# Altium PCB Texas Instruments Test Project.PcbDoc
Units mm, origin at the board's own origin, x right, y up, seen from the top; angles counter-clockwise.
Board outline 152.4 x 101.6 mm, 2 copper layers (Top Layer, Bottom Layer); 5 components, 0 nets, 70 pads, 0 vias.
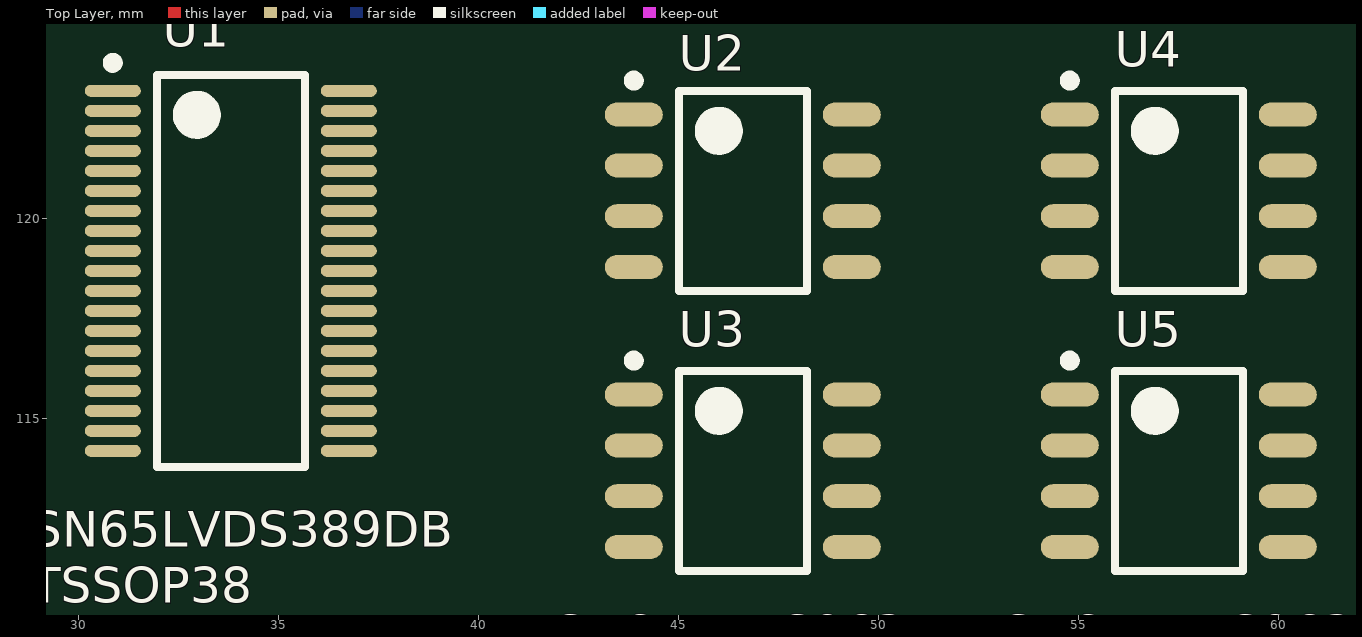
[diagram p0: Top Layer view]
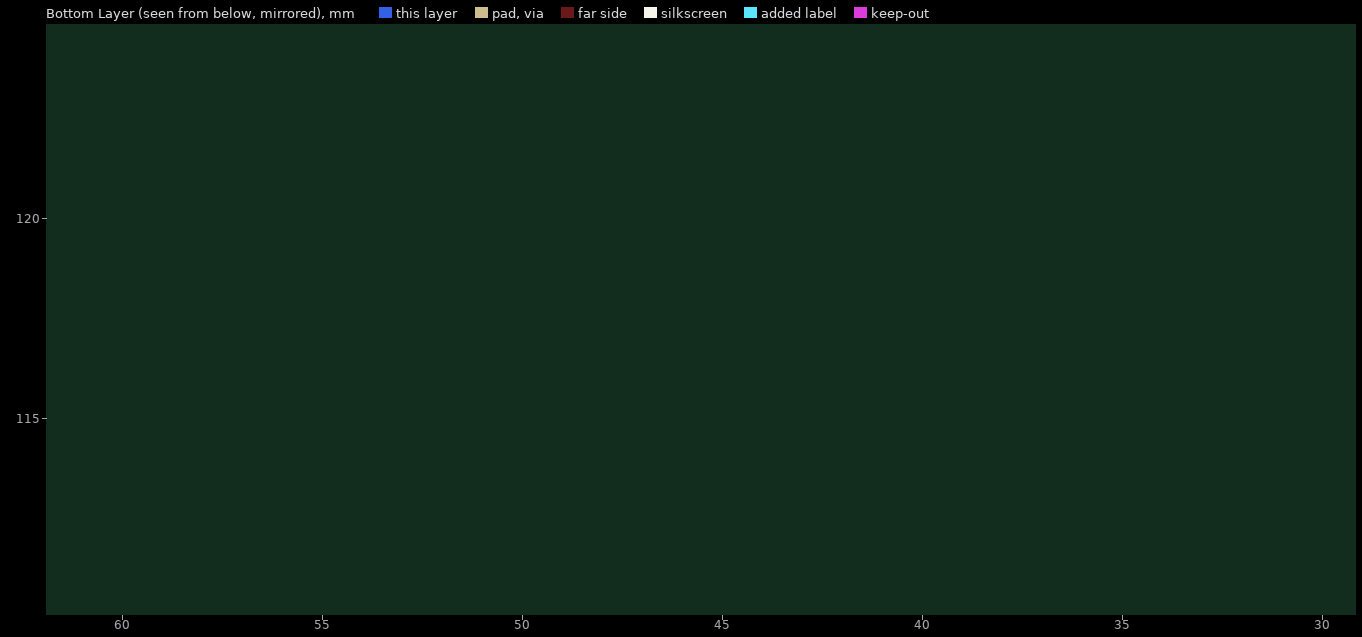
[diagram p1: Bottom Layer view, seen from below]

## Layer stack, top to bottom
Top Solder: solder mask 0.0102, Solder Resist, Dk 3.5
Top Layer: signal copper 0.0356
Dielectric 1: dielectric 0.32, FR-4, Dk 4.8
Bottom Layer: signal copper 0.0356
Bottom Solder: solder mask 0.0102, Solder Resist, Dk 3.5

## Board outline
25.4,25.4 177.8,25.4 177.8,127 25.4,127

## Design rules (kind name [scope] priority, off if disabled: settings)
Clearance [All] p1: gap=0.254
PolygonConnect [All] p1: connectstyle=Relief reliefconductorwidth=0.254 reliefentries=4 polygonreliefangle="90 Angle" airgapwidth=0.254
RoutingVias [All] p1: holewidth=0.711 width=1.27 viastyle="Through Hole" minholewidth=0.711 minwidth=1.27 maxholewidth=0.711 maxwidth=1.27
SolderMaskExpansion [All] p1: expansion=0.102
Width [All] p1: maxlimit=0.254 minlimit=0.254 preferedwidth=0.254
30 further rules are at their usual default settings.

## Components (designator, comment, footprint, x,y, rotation, side; value= is the part's Value field where it differs from the comment)
U1 "SN65LVDS389DB" "TSSOP38 - SN65LVDS389DB" 33.8,118.7 r0 top
U2 "SN65LVDS9637DR" "SOIC8 - SN65LVDS9637" 46.6,120.7 r0 top
U3 "SN65LVDS9637DR" "SOIC8 - SN65LVDS9637" 46.6,113.7 r0 top
U4 "SN65LVDS9638DR" "SOIC8 - SN65LVDS9638" 57.5,120.7 r0 top
U5 "SN65LVDS9638DR" "SOIC8 - SN65LVDS9638" 57.5,113.7 r0 top

## Footprints (in the part's own frame and the unit in brackets; to place one, negate y for a bottom-side part, rotate by r counter-clockwise, add the part's x,y. Pads: shape width x height; smd on the part's side, far side on the other; paste and mask are expansions set on the pad)
"SOIC8 - SN65LVDS9637" [mm] "SN65LVDS9637"
  oval 1.45x0.6 smd: 1(-2.725,1.905) 2(-2.725,0.635) 3(-2.725,-0.635) 4(-2.725,-1.905) 5(2.725,-1.905) 6(2.725,-0.635) 7(2.725,0.635) 8(2.725,1.905)
  silkscreen extent -2.85,-2.5 1.6,2.88, body extent -3.08,-2.5 3.08,2.5, height 1.75
"SOIC8 - SN65LVDS9638" [mm] "SN65LVDS9638"
  oval 1.45x0.6 smd: 1(-2.725,1.905) 2(-2.725,0.635) 3(-2.725,-0.635) 4(-2.725,-1.905) 5(2.725,-1.905) 6(2.725,-0.635) 7(2.725,0.635) 8(2.725,1.905)
  silkscreen extent -2.85,-2.5 1.6,2.88, body extent -3.08,-2.5 3.08,2.5, height 1.75
"TSSOP38 - SN65LVDS389DB" [mm] "SN65LVDS389DB"
  oval 1.4x0.3 smd: 1(-2.95,4.5) 2(-2.95,4) 3(-2.95,3.5) 4(-2.95,3) 5(-2.95,2.5) 6(-2.95,2) 7(-2.95,1.5) 8(-2.95,1) 9(-2.95,0.5) 10(-2.95,0) 11(-2.95,-0.5) 12(-2.95,-1) 13(-2.95,-1.5) 14(-2.95,-2) 15(-2.95,-2.5) 16(-2.95,-3) 17(-2.95,-3.5) 18(-2.95,-4) 19(-2.95,-4.5) 20(2.95,-4.5) 21(2.95,-4) 22(2.95,-3.5) 23(2.95,-3) 24(2.95,-2.5) 25(2.95,-2) 26(2.95,-1.5) 27(2.95,-1) 28(2.95,-0.5) 29(2.95,0) 30(2.95,0.5) 31(2.95,1) 32(2.95,1.5) 33(2.95,2) 34(2.95,2.5) 35(2.95,3) 36(2.95,3.5) 37(2.95,4) 38(2.95,4.5)
  silkscreen extent -3.07,-4.9 1.85,5.32, body extent -3.3,-4.9 3.3,4.9, height 1.2

## Part data
U1: "SN65LVDS - Differential Drivers and Receivers"
U2: library part "SN65LVDS9637DR Type-1", "SN65LVDS - Differential Drivers and Receivers"
U3: library part "SN65LVDS9637DR Type-2", "SN65LVDS - Differential Drivers and Receivers"
U4: library part "SN65LVDS9638DR Type-1", "SN65LVDS - Differential Drivers and Receivers"
U5: library part "SN65LVDS9638DR Type-2", "SN65LVDS - Differential Drivers and Receivers"

## Nets (pads, with @x,y where several pads share a name; then routed paths per layer and width w, separated by ;. In a path a pad name is that pad's centre, name@x,y a point inside that pad or via, vN(x,y) a via of type N, cw(c..) or ccw(c..) an arc to the next point about the centre after c; other vN are vias at no path point)
pads on no net: U1.1 U1.2 U1.3 U1.4 U1.5 U1.6 U1.7 U1.8 U1.9 U1.10 U1.11 U1.12 U1.13 U1.14 U1.15 U1.16 U1.17 U1.18 U1.19 U1.20 U1.21 U1.22 U1.23 U1.24 U1.25 U1.26 U1.27 U1.28 U1.29 U1.30 U1.31 U1.32 U1.33 U1.34 U1.35 U1.36 U1.37 U1.38 U2.1 U2.2 U2.3 U2.4 U2.5 U2.6 U2.7 U2.8 U3.1 U3.2 U3.3 U3.4 U3.5 U3.6 U3.7 U3.8 U4.1 U4.2 U4.3 U4.4 U4.5 U4.6 U4.7 U4.8 U5.1 U5.2 U5.3 U5.4 U5.5 U5.6 U5.7 U5.8

## Silkscreen, mask and mechanical layers (free items; w line width, h text height)
Top Overlay:
  text "SN65LVDS389DB" at 28.8,111.8 h0.89
  text "TSSOP38" at 28.8,110.4 h0.89
  text "SN65LVDS9637" at 41.9,109.2 h0.89
  text "SN65LVDS9638" at 53.1,109.2 h0.89
  text "SOIC8" at 41.9,107.8 h0.89
  text "SOIC8" at 53.1,107.8 h0.89